# Altium PCB PendulOptic_pcb 1.PcbDoc (part 1 of 2)
Units mm, origin at the board's own origin, x right, y up, seen from the top; angles counter-clockwise.
Board outline 83.2 x 90 mm, 2 copper layers (Top Layer, Bottom Layer); 132 components, 90 nets, 419 pads, 153 vias.
Unrouted connection lines stored in the file: 4.
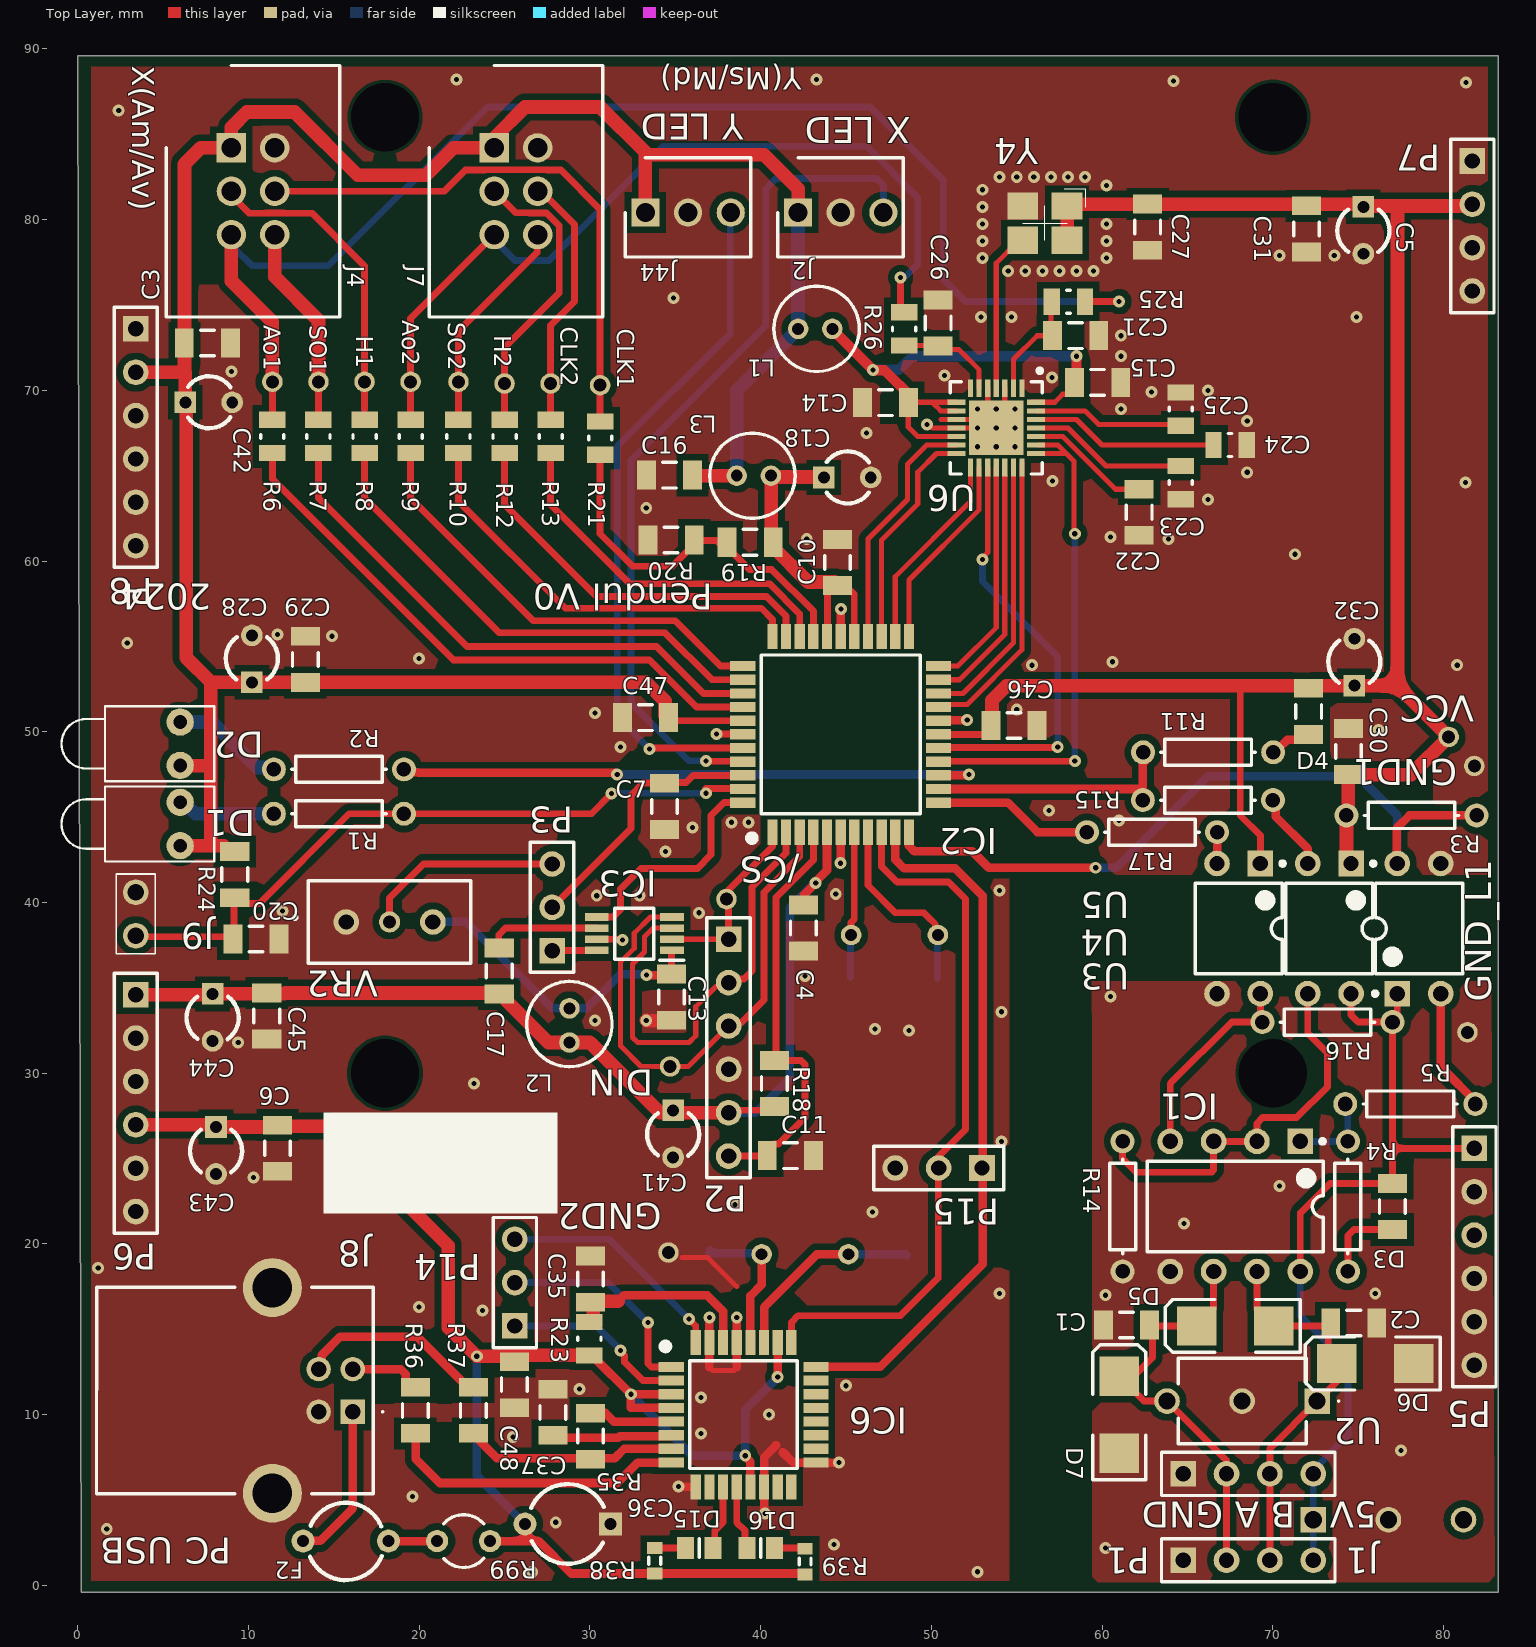
[diagram p0: Top Layer view]
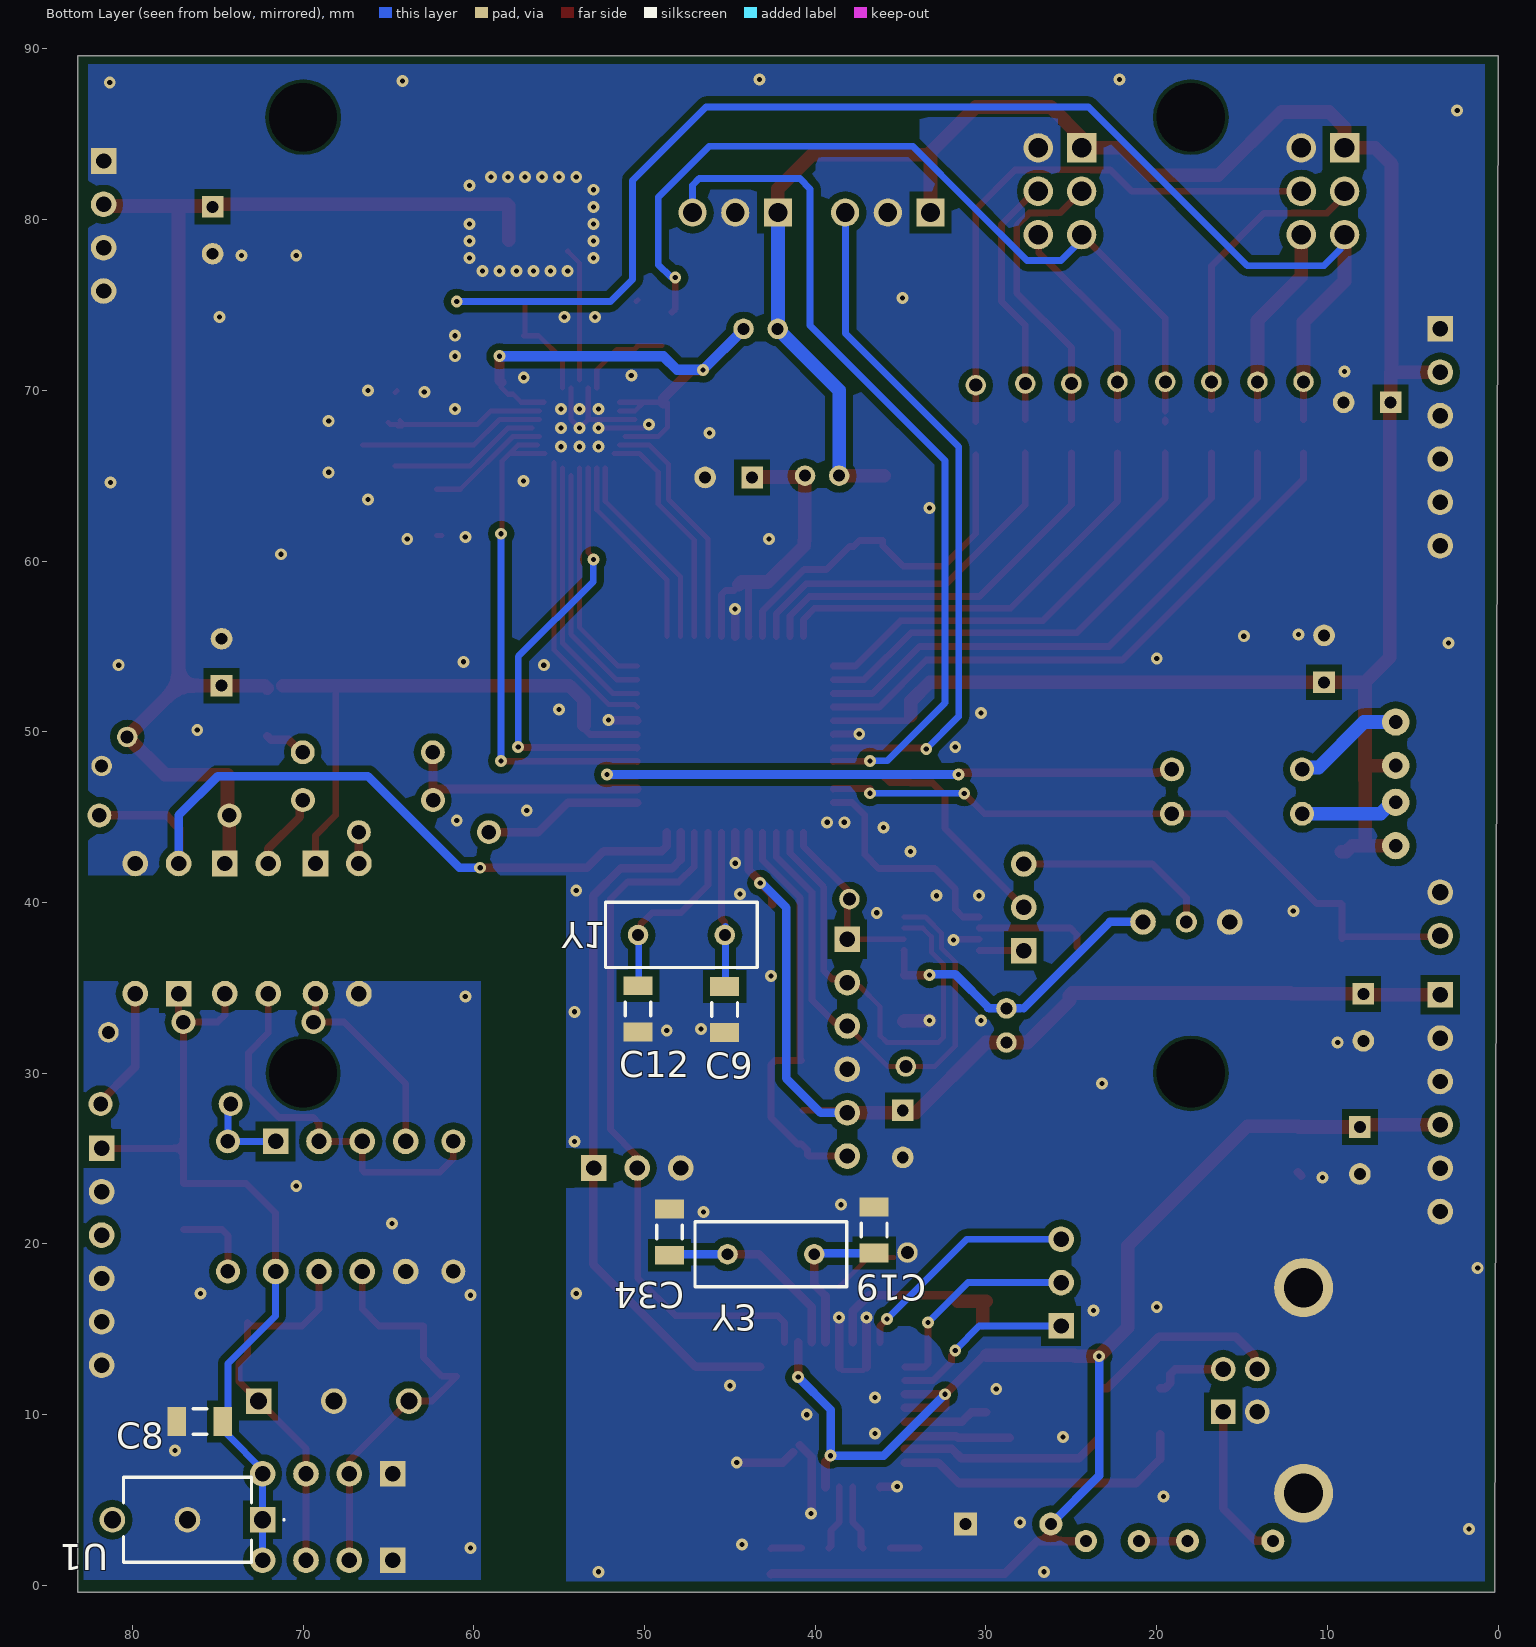
[diagram p1: Bottom Layer view, seen from below]

## Layer stack, top to bottom
Top Solder: solder mask 0.0102, Solder Resist, Dk 3.5
Top Layer: signal copper 0.0356
Dielectric 1: dielectric 0.32, FR-4, Dk 4.8
Bottom Layer: signal copper 0.0356
Bottom Solder: solder mask 0.0102, Solder Resist, Dk 3.5

## Board outline
83.2,-0.4 0.2,-0.4 0,89.6 83.2,89.6

## Design rules (kind name [scope] priority, off if disabled: settings)
Clearance [All] p1: gap=0.2 ignorepadtopadclearanceinfootprint=FALSE except(0.1: SMDPad-SMDPad; 0.4: Arc-Poly Track-Poly SMDPad-Poly THPad-Poly Via-Poly Fill-Poly Poly-Poly)
HoleSize [All] p1: absolutevalues=TRUE maxlimit=5 minlimit=0.025 maxpercent=80.000 minpercent=20.000
MinimumSolderMaskSliver [All] p1: minsoldermaskwidth=0
PlaneClearance [All] p1: clearance=0.3
PolygonConnect [All] p1: connectstyle=Direct reliefconductorwidth=0.254 reliefentries=4 polygonreliefangle="90 Angle" airgapwidth=0.254
RoomDefinition PlacaBaza [InComponentClass('PlacaBaza')] p1: confinementstyle=ConfineIn formatcopy=TRUE lockcomponents=FALSE outline 83.2,89.6 0.2,89.6 0.2,0 83.2,0
RoutingVias [All] p1: holewidth=0.3 width=0.7 viastyle="Through Hole" minholewidth=0.3 minwidth=0.7 maxholewidth=0.3 maxwidth=0.7
ShortCircuit [InNet('No Net')] p1: allowed=TRUE
SilkToSilkClearance [All] p1: silktosilkclearance=0
SilkToSolderMaskClearance [IsPad] p1: minsilkscreentomaskgap=0 clearancetoexposedcopper=TRUE
SolderMaskExpansion [All] p1: expansion=0.102 istentingtop=FALSE
Width [All] p1: maxlimit=0.8 minlimit=0.3 preferedwidth=0.4
24 further rules are at their usual default settings.

## Classes and differential pairs
component class Designator2: C19 C34 C35 C36 C37 C38 C48 D15 D16 F2 IC6 J8 P14 P15 R23 R35 R36 R37 R38 R39 R99 Y3
component class PlacaBaza: /CS Ao1 Ao2 C1 C2 C3 C4 C5 C6 C7 C8 C9 C10 C11 C12 C13 C14 C15 C16 C17 C18 C20 C21 C22 C23 C24 C25 C26 C27 C28 C29 C30 C31 C32 C41 C42 C43 C44 C45 C46 C47 CLK1 CLK2 D1 D2 D3 D4 D5 D6 D7 DIN GND1 GND2 GND_L1 H1 H2 IC1 IC2 IC3 J1 J2 J4 J7 J9 J44 L1 L2 L3 P1 P2 P3 P5 P6 P7 P8 R1 R2 R3 R4 R5 R6 R7 R8 R9 R10 R11 R12 R13 R14 R15 R16 R17 R18 R19 R20 R21 R24 R25 R26 SO1 SO2 U1 U2 U3 U4 U5 U6 VCC VR2 Y1 Y4

## Components (designator, comment, footprint, x,y, rotation, side; value= is the part's Value field where it differs from the comment)
/CS "Testpoint" TP#1 38,40.2 r90 top
Ao1 "Testpoint" TP#1 11.4,70.5 r90 top
Ao2 "Testpoint" TP#1 19.5,70.5 r90 top
C1 "1206CAP 100pF" "1206 CAP" 61.375,15.225 r180 top value=100pF
C2 "1206CAP 100pF" "1206 CAP" 74.8,15.4 r0 top value=100pF
C3 "1206CAP 100nF" "1206 CAP" 7.65,72.8 r0 top value=100nF
C4 "1206CAP 100nF" "1206 CAP" 42.525,38.45 r270 top value=100nF
C5 "1206CAP 100nF" "1206 CAP" 72,79.4 r270 top value=100nF
C6 "1206CAP 100nF" "1206 CAP" 11.725,25.55 r270 top value=100nF
C7 "1206CAP 1nF" "1206 CAP" 34.4,45.575 r270 top value=1nF
C8 "1206CAP 100nF" "1206 CAP" 76.109,9.572 r0 bottom value=100pF
C9 "1206CAP 100pF" "1206 CAP" 45.275,33.675 r270 bottom value=100pF
C10 "1206CAP 100nF" "1206 CAP" 44.475,59.971 r90 top value=100nF
C11 "1206CAP 1uF" "1206 CAP" 41.8,25.2 r0 top value=1u
C12 "1206CAP 100pF" "1206 CAP" 50.347,33.716 r270 bottom value=100pF
C13 "1206CAP 100nF" "1206 CAP" 34.8,34.4 r270 top value=100nF
C14 "1206CAP 100nF" "1206 CAP" 47.25,69.25 r180 top value=100nF
C15 "1206CAP 100nF" "1206 CAP" 59.8,70.5 r0 top value=100nF
C16 "1206CAP 100nF" "1206 CAP" 34.6,65 r180 top value=100nF
C17 "1206CAP 100pF" "1206 CAP" 24.663,36.05 r90 top value=100pF
C18 "polarized cap 2.75 pitch" CAPPRD275W50D630H1100 43.7,64.9 r0 top value=100uF
C19 "1206CAP 33pF" "1206 CAP" 36.575,20.875 r90 bottom value=33pF
C20 "1206CAP 100nF" "1206 CAP" 10.5,37.9 r0 top value=100nF
C21 "1206CAP 22pF" "1206 CAP" 58.509,73.228 r0 top value=22pF
C22 "1206CAP 100nF" "1206 CAP" 62.2,62.8 r270 top value=100nF
C23 "1206CAP 0.33uF" 0805 64.6,64.6 r90 top value=0.33pF
C24 "1206CAP 0.33uF" 0805 67.5,66.8 r180 top value=0.33pF
C25 "1206CAP 0.33uF" 0805 64.6,68.9 r270 top value=0.33pF
C26 "1206CAP 100nF" "1206 CAP" 50.372,74.009 r90 top value=100nF
C27 "1206CAP 100nF" "1206 CAP" 62.7,79.5 r270 top value=100nF
C28 "polarized cap 2.75mm pitch" CAPPRD275W50D630H1100 10.2,52.9 r90 top value=100uF
C29 "1206CAP 100nF" "1206 CAP" 13.3,54.3 r90 top value=100nF
C30 "1206CAP 100nF" "1206 CAP" 74.4,48.9 r90 top value=100nF
C31 "polarized cap 2.75mm pitch" CAPPRD275W50D630H1100 75.3,80.75 r270 top value=100uF
C32 "polarized cap 2.75mm pitch" CAPPRD275W50D630H1100 74.775,52.7 r90 top value=100uF
C34 "1206CAP 33pF" "1206 CAP" 48.575,20.75 r90 bottom value=33pF
C35 "1206CAP 100nF" "1206 CAP" 30,18 r90 top value=100nF
C36 "polarized cap 5mm pitch" "TH polarized 5mm" 28.7,3.6 r0 top value=100nF
C37 "1206CAP 33nF" "1206 CAP" 27.8,10.2 r90 top value=33nF
C41 "polarized cap 2.75mm pitch" CAPPRD275W50D630H1100 34.875,27.825 r270 top value=100uF
C42 "polarized cap 2.75mm pitch" CAPPRD275W50D630H1100 6.3,69.3 r0 top value=100uF
C43 "polarized cap 2.75mm pitch" CAPPRD275W50D630H1100 8.1,26.85 r270 top value=100uF
C44 "polarized cap 2.75mm pitch" CAPPRD275W50D630H1100 7.9,34.65 r270 top value=100uF
C45 "1206CAP 100nF" "1206 CAP" 11.1,33.3 r270 top value=100nF
C46 "1206CAP 100nF" "1206 CAP" 54.9,50.4 r0 top value=100nF
C47 "1206CAP 100nF" "1206 CAP" 33.2,50.8 r180 top value=100nF
C48 "1206CAP 100nF" "1206 CAP" 25.6,11.7 r270 top value=100nF
CLK1 "Testpoint" TP#1 30.6,70.3 r90 top
CLK2 "Testpoint" TP#2 27.3,70.4 r90 top
D1 "LED1" LED-1 6,44.6 r180 top
D2 "LED1" LED-1 6,49.3 r180 top
D3 "LED1" C1206 77,22.2 r270 top
D4 "LED1" C1206 72.1,51.2 r270 top
D5 "D Schottky" SMB 67.8,15.2 r180 top
D6 "D Schottky" SMB 76,13 r180 top
D7 "D Schottky" SMB 61,10 r90 top
D15 "LED0" 6-0805_L 36.4,2.2 r0 top
D16 "LED0" 6-0805_L 40,2.2 r180 top
DIN "Testpoint" TP#1 34.7,30.4 r90 top
F2 "Fuse 2" "THROUGH HOLE 5mm" 15.7,2.6 r0 top
GND1 "Testpoint" TP#1 81.8,48 r90 top
GND2 "Testpoint" TP#3 31.6,19.5 r90 top
GND_L1 "Testpoint" TP#1 81.4,32.4 r90 top
H1 "Testpoint" TP#1 16.8,70.5 r0 top
H2 "Testpoint" TP#4 24.7,70.4 r0 top
IC1 "SN65HVD11SJD" DIP-8 67.8,22.2 r270 top
IC2 "ATMEGA1284-PU" QFP80P1200X1200X120-44N 44.688,49.85 r90 top
IC3 "MCP4822-E_MS" SOP65P490X110-8N 32.6,38.175 r180 top
IC6 "FT232BL_TR" QFP80P900X900X160-32N 39,10 r0 top
J1 "TB008A-508-04BE" HDR1X4 64.75,1.475 r0 top
J2 "22-04-1031" SHDR3W64P0X250_1X3_700X580X1170P 42.188,80.413 r180 top
J4 "5-102619-1" SHDR6W66P254_2X3_1473X1016X1118P 9,84.2 r270 top
J7 "5-102619-1" SHDR6W66P254_2X3_1473X1016X1118P 24.4,84.2 r270 top
J8 "USB1030-GF-P-B-B" USB1030GFPBB 16.11,10.17 r270 top
J9 "87224-2" 872242 3.4,40.6 r270 top
J44 "22-04-1031" SHDR3W64P0X250_1X3_700X580X1170P 33.25,80.413 r180 top
L1 "RLB0608-471KL" RLB0608471KL 42.2,73.6 r180 top value=10mH
L2 "RLB0608-471KL" RLB0608471KL 28.8,31.8 r270 top value=10mH
L3 "RLB0608-471KL" RLB0608471KL 40.6,65 r0 top value=10mH
P1 "Header 4" HDR1X4 64.75,6.538 r0 top
P2 "Header 6H" HDR1X6 38.125,37.85 r270 top
P3 "Header 3" HDR1X3 27.788,37.175 r90 top
P5 "Header 6" HDR1X6 81.8,25.6 r270 top
P6 "Header 6" HDR1X6 3.4,34.6 r270 top
P7 "Header 4" HDR1X4 81.684,83.436 r270 top
P8 "Header 6" HDR1X6 3.4,73.6 r270 top
P14 "Header 3" HDR1X3 25.6,15.2 r90 top
P15 "Header 3" HDR1X3 52.965,24.45 r180 top
R1 "TH RES 1K" AXIAL-0.3 15.3,45.2 r180 top value=1K
R2 "TH RES 1K" AXIAL-0.3 15.3,47.8 r180 top value=1K
R3 "TH RES 2K2" AXIAL-0.3 78.125,45.1 r180 top value=2k2
R4 "TH RES 2K2" AXIAL-0.3 74.4,22.2 r270 top value=2k2
R5 "TH RES 2K2" AXIAL-0.3 78.05,28.2 r0 top value=2k2
R6 "0805RES 100 OHM" 0805 11.4,67.3 r90 top value=100
R7 "0805RES 100 OHM" 0805 14.1,67.3 r90 top value=100
R8 "0805RES 100 OHM" 0805 16.8,67.3 r90 top value=100
R9 "0805RES 100 OHM" 0805 19.5,67.3 r90 top value=100
R10 "0805RES 100 OHM" 0805 22.3,67.3 r90 top value=100
R11 "TH RES 2K2" AXIAL-0.3 66.21,48.8 r0 top value=2k2
R12 "0805RES 100 OHM" 0805 25,67.3 r90 top value=100
R13 "0805RES 100 OHM" 0805 27.7,67.3 r90 top value=100
R14 "TH RES 2K2" AXIAL-0.3 61.2,22.2 r90 top value=2k2
R15 "TH RES 2K2" AXIAL-0.3 66.2,46 r180 top value=2k2
R16 "TH RES 2K2" AXIAL-0.3 73.2,33 r0 top value=2k2
R17 "TH RES 2K2" AXIAL-0.3 62.925,44.125 r180 top value=2k2
R18 "TH RES 2K2" C1206 40.8,29.4 r90 top value=10K
R19 "1206RES 1K" "1206 CAP" 39.325,61.075 r180 top value=1K
R20 "1206RES 1K" "1206 CAP" 34.7,61.2 r180 top value=1K
R21 "0805RES 100 OHM" 0805 30.6,67.2 r270 top value="100 Ohm"
R23 "0805RES 1K" 0805 29.975,14.45 r270 top value=1K
R24 "1206RES 4K7" "1206 CAP" 9.225,41.575 r270 top value=4k7
R25 "0805RES 50 OHM" 0805 58.025,75.2 r0 top value="50 Ohm"
R26 "0805RES 50 OHM" 0805 48.4,73.6 r90 top value="50 Ohm"
R35 "1206RES 1K5" "1206 CAP" 30,8.8 r90 top value=1.5K
R36 "1206RES 27 OHM" "1206 CAP" 19.8,10.2 r270 top value=27
R37 "1206RES 27 OHM" "1206 CAP" 23.2,10.2 r270 top value=27
R38 "0603RES 1K" J1-0603 33.8,1.45 r270 top value=1K
R39 "0603RES 1K" J1-0603 42.6,1.4 r270 top value=1K
R99 "PTC" R38 22.6,2.6 r90 top
SO1 "Testpoint" TP#1 14.1,70.5 r90 top
SO2 "Testpoint" TP#5 22.2,70.5 r90 top
U1 "2036-07-B2LF" 203607B2LF 72.37,3.848 r0 bottom
U2 "2036-07-B2LF" 203607B2LF 72.6,10.8 r180 top
U3 "Optoisolator1" DIP-4 78.563,38.475 r90 top
U4 "Optoisolator1" DIP-4 73.313,38.475 r270 top
U5 "Optoisolator1" DIP-4 68,38.475 r270 top
U6 "MAX1193" QFN50P500X500X80_HS-29N 53.8,67.8 r270 top
VCC "Testpoint" TP#1 80.3,49.7 r90 top
VR2 "3296W-1-104LF" 3296W-1 18.265,38.863 r0 top
Y1 "XTAL" RAD-0.2 47.84,38.1 r180 bottom
Y3 "6MHz" RAD-0.2 42.6,19.4 r0 bottom
Y4 "Crystal SG-8018CB 40M" SG-8018CB 56.65,79.8 r180 top

## Footprints (in the part's own frame and the unit in brackets; to place one, negate y for a bottom-side part, rotate by r counter-clockwise, add the part's x,y. Pads: shape width x height; smd on the part's side, far side on the other; paste and mask are expansions set on the pad)
6-0805_L [mm] "Chip Resistor, Body 2.0x1.2mm, IPC High Density"
  rect 1x1.3 smd: 1(-0.8,0) 2(0.8,0)
  silkscreen extent 0,-0.55 0,0.55, body extent -1.07,-0.7 1.07,0.7, height 0.7
0805 [mm]
  rect 0.95x1.55 smd: 1(-0.975,0) 2(0.975,0)
  silkscreen extent -0.1,-0.67 0.1,0.67, body extent -1,-0.77 1,0.77, height 1.45
"1206 CAP" [mm]
  rect 1.1x1.7 smd: 1(1.291,-0.028) 2(-1.409,-0.028)
  silkscreen extent -0.46,-0.78 0.34,0.72, body extent -1.76,-0.93 1.64,0.87, height 1.3
3296W-1 [mm]
  round 1.5 hole 0.9: 1(-2.54,0) 3(2.54,0)
  round 1.24 hole 0.74: 2(0,0)
  silkscreen extent -5.64,-2.41 4.76,2.41, body extent -4.78,-2.48 4.78,2.35, height 11.55
203607B2LF [mm]
  rect 1.5x1.5 hole 1: 1(0,0)
  round 1.5 hole 1: 2(4.4,0) 3(8.8,0)
  silkscreen extent -1.3,-2.5 8.15,2.5, body extent -0.4,-2.5 9.2,2.5, height 5.4
872242 [mil]
  round 59.09 hole 38: 1(0,0) 2(100,0)
  silkscreen extent -42,-45 142,45, body extent -42,-46 142,46, height 410
AXIAL-0.3 [mm] "Axial Device, Thru-Hole; 2 Leads; 0.3 in Pin Spacing"
  round 1.4 hole 0.85: 1(-3.81,0) 2(3.81,0)
  silkscreen extent -2.77,-0.76 2.77,0.76
C1206 [mm] "Chip Capacitor, Body 3.2x1.6mm, IPC High Density"
  rect 1.1x1.7 smd: 1(-1.35,0) 2(1.35,0)
  silkscreen extent -0.4,-0.75 0.4,0.75, body extent -1.7,-0.9 1.7,0.9, height 1.3
CAPPRD275W50D630H1100 [mm]
  rect 1.27x1.27 hole 0.7: 1(0,0)
  round 1.27 hole 0.7: 2(2.75,0)
  silkscreen extent 0.16,-1.52 2.65,1.53
DIP-4 [mm] "DIP; 4 Leads; Row Spacing 7.62 mm; Pitch 2.54 mm"
  rect 1.5x1.5 hole 0.9: 1(-3.81,1.27)
  round 1.5 hole 0.9: 2(-3.81,-1.27) 3(3.81,-1.27) 4(3.81,1.27)
  silkscreen extent -3.93,-2.55 2.65,2.69, body extent -3.15,-2.5 3.15,2.5, height 5.6
DIP-8 [mm] "DIP; 8 Leads; Row Spacing 7.62 mm; Pitch 2.54 mm"
  rect 1.5x1.5 hole 0.9: 1(-3.81,3.81)
  round 1.5 hole 0.9: 2(-3.81,1.27) 3(-3.81,-1.27) 4(-3.81,-3.81) 5(3.81,-3.81) 6(3.81,-1.27) 7(3.81,1.27) 8(3.81,3.81)
  silkscreen extent -3.93,-5.15 2.65,5.24, body extent -3.6,-5.15 3.6,5.15, height 5.08
HDR1X3 [mm] "Connector; Header; 3 Position"
  rect 1.5x1.5 hole 0.9: 1(0,0)
  round 1.5 hole 0.9: 2(2.54,0) 3(5.08,0)
  silkscreen extent -1.27,-1.27 6.35,1.27
HDR1X4 [mm] "Connector; Header; 4 Position"
  rect 1.5x1.5 hole 0.9: 1(0,0)
  round 1.5 hole 0.9: 2(2.54,0) 3(5.08,0) 4(7.62,0)
  silkscreen extent -1.27,-1.27 8.89,1.27
HDR1X6 [mm] "Connector; Header; 6 Position"
  rect 1.5x1.5 hole 0.9: 1(0,0)
  round 1.5 hole 0.9: 2(2.54,0) 3(5.08,0) 4(7.62,0) 5(10.16,0) 6(12.7,0)
  silkscreen extent -1.27,-1.27 13.97,1.27
J1-0603 [mm] "Chip Resistor, Body 1.6x0.8mm, IPC High Density"
  rect 0.7x0.9 smd: 1(-0.75,0) 2(0.75,0)
  silkscreen extent -0.2,-0.35 0.2,0.35, body extent -0.85,-0.48 0.85,0.48, height 0.9
LED-1 [mm] "LED; 2 Leads"
  round 1.6 hole 0.8: 1(0,1.27) 2(0,-1.27)
  silkscreen extent -2,-2.2 6.95,2.2
QFN50P500X500X80_HS-29N [mm] "QFN, 28-Leads, Body 5.00x5.00mm, Pitch 0.50mm, Thermal Pad 3.20x3.20mm, IPC Medium Density"
  rect 1.05x0.3 smd mask+0.08: 1(-2.325,1.5) 2(-2.325,1) 3(-2.325,0.5) 4(-2.325,0) 5(-2.325,-0.5) 6(-2.325,-1) 7(-2.325,-1.5) 15(2.325,-1.5) 16(2.325,-1) 17(2.325,-0.5) 18(2.325,0) 19(2.325,0.5) 20(2.325,1) 21(2.325,1.5)
  rect 0.3x1.05 smd mask+0.08: 8(-1.5,-2.325) 9(-1,-2.325) 10(-0.5,-2.325) 11(0,-2.325) 12(0.5,-2.325) 13(1,-2.325) 14(1.5,-2.325) 22(1.5,2.325) 23(1,2.325) 24(0.5,2.325) 25(0,2.325) 26(-0.5,2.325) 27(-1,2.325) 28(-1.5,2.325)
  rect 3.2x3.2 smd mask+0.05: 29(0,0)
  silkscreen extent -3.47,-2.7 2.7,2.7, body extent -2.6,-2.6 2.6,2.6, height 0.8
QFP80P900X900X160-32N [mm]
  rect 1.475x0.6 smd: 1(-4.238,2.8) 2(-4.238,2) 3(-4.238,1.2) 4(-4.238,0.4) 5(-4.238,-0.4) 6(-4.238,-1.2) 7(-4.238,-2) 8(-4.238,-2.8) 17(4.238,-2.8) 18(4.238,-2) 19(4.238,-1.2) 20(4.238,-0.4) 21(4.238,0.4) 22(4.238,1.2) 23(4.238,2) 24(4.238,2.8)
  rect 0.6x1.475 smd: 9(-2.8,-4.238) 10(-2,-4.238) 11(-1.2,-4.238) 12(-0.4,-4.238) 13(0.4,-4.238) 14(1.2,-4.238) 15(2,-4.238) 16(2.8,-4.238) 25(2.8,4.238) 26(2,4.238) 27(1.2,4.238) 28(0.4,4.238) 29(-0.4,4.238) 30(-1.2,4.238) 31(-2,4.238) 32(-2.8,4.238)
  silkscreen extent -4.77,-3.15 3.15,4.2, body extent -4.5,-4.5 4.5,4.5, height 1.6
QFP80P1200X1200X120-44N [mm]
  rect 1.475x0.6 smd: 1(-5.738,4) 2(-5.738,3.2) 3(-5.738,2.4) 4(-5.738,1.6) 5(-5.738,0.8) 6(-5.738,0) 7(-5.738,-0.8) 8(-5.738,-1.6) 9(-5.738,-2.4) 10(-5.738,-3.2) 11(-5.738,-4) 23(5.738,-4) 24(5.738,-3.2) 25(5.738,-2.4) 26(5.738,-1.6) 27(5.738,-0.8) 28(5.738,0) 29(5.738,0.8) 30(5.738,1.6) 31(5.738,2.4) 32(5.738,3.2) 33(5.738,4)
  rect 0.6x1.475 smd: 12(-4,-5.738) 13(-3.2,-5.738) 14(-2.4,-5.738) 15(-1.6,-5.738) 16(-0.8,-5.738) 17(0,-5.738) 18(0.8,-5.738) 19(1.6,-5.738) 20(2.4,-5.738) 21(3.2,-5.738) 22(4,-5.738) 34(4,5.738) 35(3.2,5.738) 36(2.4,5.738) 37(1.6,5.738) 38(0.8,5.738) 39(0,5.738) 40(-0.8,5.738) 41(-1.6,5.738) 42(-2.4,5.738) 43(-3.2,5.738) 44(-4,5.738)
  silkscreen extent -6.27,-4.65 4.65,5.4, body extent -6,-6 6,6, height 1.2
R38 [mm] "Crystal, Thru-Hole; 2 Leads; Body 3.1 x 8.2 mm (Dia.xH)"
  round 1.3 hole 0.7: 1(0,1.55) 2(0,-1.55)
  silkscreen extent -1.55,-1.19 1.55,1.17
RAD-0.2 [mm] "Radial Cap, Thru-Hole; 2 Leads; 0.2 in Pin Spacing"
  round 1.2 hole 0.7: 1(-2.54,0) 2(2.54,0)
  silkscreen extent -4.44,-1.91 4.44,1.91
RLB0608471KL [mm]
  round 1.2 hole 0.7: 1(0,0) 2(-2,0)
  silkscreen extent -3.58,-2.5 1.42,2.5, body extent -3.5,-2.5 1.5,2.5, height 7.6
SG-8018CB [mm]
  rect 1.8x1.6 smd mask+0.1: 1(-1.3,-1) 2(1.3,-1) 3(1.3,1) 4(-1.3,1)
  rect 1.8x1.6 on Top Paste mask+0.3: 1(-1.3,-1) 2(1.3,-1) 3(1.3,1) 4(-1.3,1)
  silkscreen extent -2.4,-2 1.3,1, body extent -2.53,-1.7 2.47,1.7, height 1.2
SHDR3W64P0X250_1X3_700X580X1170P [mm]
  rect 1.65x1.65 hole 1.1: 1(0,0)
  round 1.65 hole 1.1: 2(-2.5,0) 3(-5,0)
  silkscreen extent -6.18,-3.2 1.17,2.6, body extent -6,-3.2 1,2.6, height 11.7
SHDR6W66P254_2X3_1473X1016X1118P [mm]
  rect 1.725x1.725 hole 1.15: 1(0,0)
  round 1.725 hole 1.15: 2(0,2.54) 3(2.54,0) 4(2.54,2.54) 5(5.08,0) 6(5.08,2.54)
  silkscreen extent -4.83,-3.81 9.91,6.35, body extent -4.83,-3.32 9.91,6.84, height 11.18
SMB [mm] "DO-214-AA/SMB; 2 C-Bend Leads; Body 5.3 x 3.6 mm, inc. leads (LxW)"
  rect 2.3x2.3 smd: 1(-2.25,0) 2(2.25,0)
  silkscreen extent -3.8,-1.55 4.1,1.55
SOP65P490X110-8N [mm]
  rect 1.4x0.45 smd: 1(-2.2,0.975) 2(-2.2,0.325) 3(-2.2,-0.325) 4(-2.2,-0.975) 5(2.2,-0.975) 6(2.2,-0.325) 7(2.2,0.325) 8(2.2,0.975)
  silkscreen extent -2.9,-1.5 1.15,1.55, body extent -2.45,-1.5 2.45,1.5, height 1.1
"TH polarized 5mm" [mm]
  rect 1.35x1.35 hole 0.7: 1(2.5,0)
  round 1.35 hole 0.7: 2(-2.5,0)
  silkscreen extent -2.15,-2.33 2.12,2.34
"THROUGH HOLE 5mm" [mm]
  round 1.35 hole 0.7: 1(-2.5,0) 2(2.5,0)
  silkscreen extent -2.1,-2.29 2.12,2.24
TP#1 [mm] "Test point"
  round 1.2 hole 0.762: 1(0,0)
TP#2 [mm] "Test point"
  round 1.2 hole 0.762: 1(0,-0.4)
TP#3 [mm] "Test point"
  round 1.2 hole 0.762: 1(0,-3)
TP#4 [mm] "Test point"
  round 1.2 hole 0.762: 1(0.3,0)
TP#5 [mm] "Test point"
  round 1.2 hole 0.762: 1(0,-0.1)
USB1030GFPBB [mm]
  rect 1.431x1.431 hole 0.92: 1(0,0)
  round 1.431 hole 0.92: 2(-2.5,0) 3(-2.5,-2) 4(0,-2)
  round 3.45 hole 2.3: MH1(4.77,-4.71) MH2(-7.27,-4.71)
  silkscreen extent -7.3,-15.01 4.8,1.8, body extent -8.32,-15.01 5.82,1.19, height 11.3

## Part data
/CS Ao1 Ao2 CLK1 CLK2 DIN GND1 GND2 GND_L1 H1 H2 SO1 SO2 VCC: library part "Test point"
C1 C2: library part 04023A101FAT2A, Manufacturer_Name=AVX, Mouser Part Number=581-04023A101F, Arrow Part Number=04023A101FAT2A, Arrow Price/Stock=https://www.arrow.com/en/products/04023a101fat2a/avx, Datasheet Link=http://www.mouser.com/catalog/supplier/library/pdf/AVXSurfaceMountCeramic.pdf, Height=0.56mm, Manufacturer_Part_Number=04023A101FAT2A, Mouser Price/Stock=https://www.mouser.co.uk/ProductDetail/AVX/04023A101FAT2A/?qs=TT2fvNIaLUf5Vh3Ocjdicw%3D%3D
C3 C4 C5 C6 C7 C8 C10 C11 C13 C14 C15 C16 C17 C20 C21 C22 C26 C27 C29 C30 C45 C46 C47: library part Cap, LatestRevisionDate=17-Jul-2002, LatestRevisionNote="Re-released for DXP Platform.", PackageDescription="Radial Cap, Thru-Hole; 2 Leads; 0.3 in Pin Spacing", PackageReference=RAD-0.3, Published=8-Jun-2000, Publisher="Altium Limited"
C9 C12 C19 C34 C35 C37 C48: library part "Cap Semi", LatestRevisionDate=29-May-2009, LatestRevisionNote="IPC-7351 Footprint Added.", PackageDescription="Chip Capacitor", PackageReference=C1206, Published=8-Jun-2000, Publisher="Altium Limited"
C18 C41 C42 C43 C44: library part MAL215299601E3, Manufacturer_Name=Vishay, Mouser Part Number=594-MAL215299601E3, Datasheet Link=https://www.vishay.com/docs/28459/152cme.pdf, Height=10.5mm, Manufacturer_Part_Number=MAL215299601E3, Mouser Price/Stock=https://www.mouser.co.uk/ProductDetail/Vishay-BC-Components/MAL215299601E3?qs=xZ%2FP%252Ba9zWqbQPLOp9z%2FTFg%3D%3D
C23 C24 C25: library part 08055A150JAT2A, Manufacturer_Name="Kyocera AVX", Mouser Part Number=581-08055A150J, Arrow Part Number=08055A150JAT2A, Arrow Price/Stock=https://www.arrow.com/en/products/08055a150jat2a/avx?region=nac, Datasheet Link=https://componentsearchengine.com/Datasheets/1/06031A100FAT2A.pdf, Height=0.94mm, Manufacturer_Part_Number=08055A150JAT2A, Mouser Price/Stock=https://www.mouser.co.uk/ProductDetail/AVX/08055A150JAT2A?qs=pZVDklL%2Fs8hiEua37sqbaA%3D%3D
C28 C31 C32: library part MAL203855101E3, Manufacturer_Name=Vishay, Mouser Part Number=594-MAL203855101E3, Datasheet Link=https://ms.componentsearchengine.com/Datasheets/2/MAL203855101E3.pdf, Height=11mm, Manufacturer_Part_Number=MAL203855101E3, Mouser Price/Stock=https://www.mouser.co.uk/ProductDetail/Vishay-BC-Components/MAL203855101E3?qs=G99oyVYclWVud%252B%2Fs3vRKoA%3D%3D
C36: library part Cap2, PackageDescription="Capacitor; 2 Leads", PackageReference=CAPR5-4X5, Published=23-Sep-2002, Publisher="Altium Limited"
D1 D2 D3 D4: "Typical RED GaAs LED", LatestRevisionDate=08-Jul-2005, LatestRevisionNote="Mech Layer 1 removed.", PackageDescription="LED; 2 Leads", PackageReference=LED-1, Published=8-Jun-2000, Publisher="Altium Limited"
D5 D6 D7: "Schottky Diode", Code_JEDEC=DO-214-AA, LatestRevisionDate=17-Jul-2002, LatestRevisionNote="Re-released for DXP Platform.", PackageDescription="DO-214-AA/SMB; 2 C-Bend Leads; Body 5.3 x 3.6 mm, inc. leads (LxW)", PackageReference=SMB, Published=8-Jun-2000, Publisher="Altium Limited"
D15 D16: "Typical INFRARED GaAs LED", LatestRevisionDate=08-Jul-2005, LatestRevisionNote="Mech Layer 1 removed.", PackageDescription="LED; 2 Leads", PackageReference=LED-0, Published=8-Jun-2000, Publisher="Altium Limited"
F2: "Fuse", LatestRevisionDate=17-Jul-2002, LatestRevisionNote="Re-released for DXP Platform.", PackageDescription="Thru-Hole; 2 Leads", PackageReference=PIN-W2/E2.8, Published=8-Jun-2000, Publisher="Altium Limited"
IC1: "Integrated Circuit", Manufacturer_Name="Texas Instruments", Mouser Part Number=595-SN65HVD11SJD, Arrow Part Number=SN65HVD11SJD, Arrow Price/Stock=https://www.arrow.com/en/products/sn65hvd11sjd/texas-instruments, Datasheet Link=https://www.arrow.com/en/products/sn65hvd11sjd/texas-instruments, Height=4.45mm, Manufacturer_Part_Number=SN65HVD11SJD
IC2: "Integrated Circuit", Manufacturer_Name=Microchip, Mouser Part Number=556-ATMEGA1284-PU, Arrow Part Number=ATMEGA1284-PU, Arrow Price/Stock=https://www.arrow.com/en/products/atmega1284-pu/microchip-technology?region=nac, Datasheet Link=https://datasheet.datasheetarchive.com/originals/distributors/Datasheets_SAMA/b69cbc8d70054e051fa5fe38e41d8927.pdf, Height=4.826mm, Manufacturer_Part_Number=ATMEGA1284-PU, Mouser Price/Stock=https://www.mouser.co.uk/ProductDetail/Microchip-Technology-Atmel/ATMEGA1284-PU?qs=lwdSMh1%2FoYI%2FXs3D3l%2Fp1w%3D%3D
IC3: "Integrated Circuit", Arrow Part Number=MCP4822-E/MS, Manufacturer_Name=Microchip, Mouser Part Number=579-MCP4822-E/MS, Arrow Price/Stock=https://www.arrow.com/en/products/mcp4822-ems/microchip-technology?region=nac, Datasheet Link=https://datasheet.datasheetarchive.com/originals/distributors/Datasheets-DGA17/911642.pdf, Height=1.1mm, Manufacturer_Part_Number=MCP4822-E/MS, Mouser Price/Stock=https://www.mouser.co.uk/ProductDetail/Microchip-Technology-Atmel/MCP4822-E-MS?qs=usxtMOJb1Rzc5xsp0Zr6iQ%3D%3D
IC6: "Integrated Circuit", Manufacturer_Name="FTDI Chip", Manufacturer_Part_Number=FT232BL/TR, Datasheet Link=http://www.ftdichip.com/Support/Documents/DataSheets/ICs/DS_FT232BL_BQ.pdf, Height=1.6mm
J1: "Connector", Manufacturer_Name="CUI Devices", Mouser Part Number=490-TB008A-508-04BE, Datasheet Link=https://www.mouser.com/datasheet/2/670/tb008a_508-1550650.pdf, Height=16.22mm, Manufacturer_Part_Number=TB008A-508-04BE, Mouser Price/Stock=https://www.mouser.co.uk/ProductDetail/CUI-Devices/TB008A-508-04BE?qs=vLWxofP3U2wE%252BeCFz1tLxg%3D%3D
J2 J44: "Connector", Manufacturer_Name=Molex, Mouser Part Number=538-22-04-1031, Datasheet Link=https://componentsearchengine.com/Datasheets/2/22-04-1031.pdf, Height=11.7mm, Manufacturer_Part_Number=22-04-1031, Mouser Price/Stock=https://www.mouser.co.uk/ProductDetail/Molex/22-04-1031?qs=h9d0Ik7kMyy7or8gS%2F3ZEA%3D%3D
J4 J7: "Connector", Manufacturer_Name="TE Connectivity", Mouser Part Number=571-5-102619-1, Arrow Part Number=5-102619-1, Arrow Price/Stock=https://www.arrow.com/en/products/5-102619-1/te-connectivity, Datasheet Link=https://www.te.com/commerce/DocumentDelivery/DDEController?Action=showdoc&DocId=Customer+Drawing%7F102619%7FK3%7Fpdf%7FEnglish%7FENG_CD_102619_K3.pdf%7F5-102619-1, Height=11.176mm, Manufacturer_Part_Number=5-102619-1, Mouser Price/Stock=https://www.mouser.com/Search/Refine.aspx?Keyword=571-5-102619-1
J8: "Connector", Manufacturer_Name="GCT (GLOBAL CONNECTOR TECHNOLOGY)", Mouser Part Number=640-USB1030-GF-P-B-B, Datasheet Link=https://gct.co/files/drawings/usb1030.pdf?v=6f3e53a4-19ab-41a0-8ac3-960e4d6fce65, Height=11.2mm, Manufacturer_Part_Number=USB1030-GF-P-B-B, Mouser Price/Stock=https://www.mouser.co.uk/ProductDetail/GCT/USB1030-GF-P-B-B?qs=KUoIvG%2F9Ila4yhPpaOZhHA%3D%3D
J9: "Connector", Manufacturer_Name="TE Connectivity", Mouser Part Number=571-872242, Arrow Part Number=87224-2, Arrow Price/Stock=https://www.arrow.com/en/products/87224-2/te-connectivity?region=europe, Datasheet Link=https://datasheet.datasheetarchive.com/originals/distributors/Datasheets_SAMA/3b9b08c08f06dc562fe3ba32b60fa864.pdf, Height=10.3632mm, Manufacturer_Part_Number=87224-2, Mouser Price/Stock=https://www.mouser.co.uk/ProductDetail/TE-Connectivity/87224-2?qs=ZDXmSm13591yVHBRfmL3UQ%3D%3D
L1 L2 L3: "Inductor", Manufacturer_Name=Bourns, Mouser Part Number=652-RLB0608-471KL, Arrow Part Number=RLB0608-471KL, Arrow Price/Stock=https://www.arrow.com/en/products/rlb0608-471kl/bourns, Datasheet Link=https://componentsearchengine.com/Datasheets/2/RLB0608-471KL.pdf, Height=7.5mm, Manufacturer_Part_Number=RLB0608-471KL, Mouser Price/Stock=https://www.mouser.co.uk/ProductDetail/Bourns/RLB0608-471KL?qs=qtLBrsE9qZLH%252BdKTQ9WHfg%3D%3D
P1 P7: "Header, 4-Pin", LatestRevisionDate=17-Jul-2002, LatestRevisionNote="Re-released for DXP Platform.", Publisher="Altium Limited"
P2: "Header, 6-Pin, Right Angle", LatestRevisionDate=17-Jul-2002, LatestRevisionNote="Re-released for DXP Platform.", Publisher="Altium Limited"
P3 P14 P15: "Header, 3-Pin", LatestRevisionDate=17-Jul-2002, LatestRevisionNote="Re-released for DXP Platform.", Publisher="Altium Limited"
P5 P6 P8: "Header, 6-Pin", LatestRevisionDate=17-Jul-2002, LatestRevisionNote="Re-released for DXP Platform.", Publisher="Altium Limited"
R1 R2 R3 R4 R5 R11 R14 R15 R16 R17 R18 R19 R20 R24: library part Res1, LatestRevisionDate=17-Jul-2002, LatestRevisionNote="Re-released for DXP Platform.", PackageDescription="Axial Device, Thru-Hole; 2 Leads; 0.3 in Pin Spacing", PackageReference=AXIAL-0.3, Published=8-Jun-2000, Publisher="Altium Limited"
R6 R7 R8 R9 R10 R12 R13 R23 R35 R36 R37 R38 R39: library part Res3, LatestRevisionDate=29-May-2009, LatestRevisionNote="IPC-7351 Footprint Added.", PackageDescription="Chip Resistor", PackageReference=J1-0603, Published=8-Jun-2000, Publisher="Altium Limited"
R21 R25 R26: library part "RES 0402"
R99: library part "Res Varistor", "Varistor (Voltage-Sensitive Resistor)", Code_IPC=RESC2012, LatestRevisionDate=29-May-2009, LatestRevisionNote="IPC-7351 Footprint Added.", PackageDescription="Chip Resistor 0805 Case Size", PackageReference=6-0805, PackageVersion=Mar-2003, Published=24-Mar-1999, Publisher="Altium Limited"
U1 U2: "Undefined or Miscellaneous", Manufacturer_Name=Bourns, Mouser Part Number=652-2036-07-B2LF, Arrow Part Number=2036-07-B2LF, Arrow Price/Stock=https://www.arrow.com/en/products/2036-07-b2lf/bourns?region=nac, Datasheet Link=https://www.bourns.com/docs/Product-Datasheets/2036.pdf, Height=5.3mm, Manufacturer_Part_Number=2036-07-B2LF, Mouser Price/Stock=https://www.mouser.co.uk/ProductDetail/Bourns/2036-07-B2LF?qs=kJlCKCzaZTNDPuw9%252B%252B%252BnbA%3D%3D
U3 U4 U5: "4-Pin Phototransistor Optocoupler", DatasheetVersion=Nov-2003, LatestRevisionDate=04-Mar-2005, LatestRevisionNote="Sch pins 3 & 4 Swapped.", PackageReference=DIP-4, Published=24-Mar-1999, Publisher="Altium Limited"
VR2: "Variable Resistor", Manufacturer_Name=Bourns, Mouser Part Number=652-3296W-1-104LF, Arrow Part Number=3296W-1-104LF, Arrow Price/Stock=https://www.arrow.com/en/products/3296w-1-104lf/bourns?region=europe, Datasheet Link=https://datasheet.datasheetarchive.com/originals/distributors/Datasheets-10/DSA-187647.pdf, Manufacturer_Part_Number=3296W-1-104LF, Mouser Price/Stock=https://www.mouser.co.uk/ProductDetail/Bourns/3296W-1-104LF?qs=NxuKWO2Bm4Yv9t2iisRb6w%3D%3D
Y1: "Crystal Oscillator", LatestRevisionDate=17-Jul-2002, LatestRevisionNote="Re-released for DXP Platform.", PackageDescription="Crystal, Thru-Hole; 2 Leads; Body 3.1 x 8.2 mm (Dia.xH)", PackageReference=R38, Published=8-Jun-2000, Publisher="Altium Limited"
Y3: library part XTAL, "Crystal Oscillator", LatestRevisionDate=17-Jul-2002, LatestRevisionNote="Re-released for DXP Platform.", PackageDescription="Crystal, Thru-Hole; 2 Leads; Body 3.1 x 8.2 mm (Dia.xH)", PackageReference=R38, Published=8-Jun-2000, Publisher="Altium Limited"

## Free pads (board coordinates)
  round 1.524 hole 4: 0(70,86) 1(18,86) 2(18,30) 3(70,30)

## Via types
v1: diameter 0.7, hole 0.3, Top Layer to Bottom Layer, 153 vias

## Nets (pads, with @x,y where several pads share a name; then routed paths per layer and width w, separated by ;. In a path a pad name is that pad's centre, name@x,y a point inside that pad or via, vN(x,y) a via of type N, cw(c..) or ccw(c..) an arc to the next point about the centre after c; other vN are vias at no path point)
/CS: /CS.1 IC2.1 IC3.2 P2.1 | length 10.6
  Top Layer w0.3: IC3.2 P2.1
  Top Layer w0.4: P2.1 38.125,40.725 40.688,43.288 IC2.1
/LDATE: IC2.44 IC3.5 | length 13.4
  Top Layer w0.4: IC3.5 30.412,39.162 31.362,39.162 31.8,39.6 31.8,40.8 33,42 36.3,42 37.1,42.8 37.1,45.1 37.85,45.85 IC2.44
/SHDN: C17.1 IC3.6 | length 6.6
  Top Layer w0.4: C17.1@24.663,37.4 24.663,38.113 25.05,38.5 IC3.6
A: C1.2 D5.2 D7.2 IC1.6 J1.2 P1.2 U2.3 | length 24.6
  Top Layer w0.4: IC1.6 66.53,16.18 D5.2 62.95,15.2 62.95,13.35 61.85,12.25 D7.2 62.45,10.8 U2.3 67.29,7.31 P1.2 J1.2
A0: IC2.30 R19.1 R20.2 R21.2 | length 21.9
  Top Layer w0.4: R21.2 30.6,61.6 32.5,59.7 34.85,59.7 36.05,60.9 36.05,61.2 37.4,61.2 37.75,60.85 38,60.85 38.3,60.55 39.35,59.5 40.65,59.5 43.088,57.062 IC2.30
A/B: IC2.16 U6.17 | length 25.3
  Top Layer w0.3: v1(53,60.1) 53,60.208 53.3,60.508 U6.17@53.3,65.45
  Top Layer w0.4: IC2.16 50.45,49.075 57.375,49.075 v1(57.4,49.1)
  Bottom Layer w0.4: v1(53,60.1) 53,58.8 57.4,54.4 v1(57.4,49.1)
AO1: Ao1.1 J4.5 R6.2 R25.2 | length 78.9
  Top Layer w0.4: R6.2 Ao1.1 ; R25.2 v1(61,75.2)
  Top Layer w0.8: J4.5 9,76.4 11.4,74 Ao1.1
  Bottom Layer w0.4: J4.5 9.254,78.866 9.254,78.246 10.2,77.3 14.7,77.3 24,86.6 46.4,86.6 50.7,82.3 50.7,76.5 52,75.2 v1(61,75.2)
AO2: Ao2.1 J7.5 R9.2 R26.2 | length 49.1
  Top Layer w0.4: R9.2@19.5,68.155 R9.2 ; 19.5,68.775 Ao2.1@19.5,70.184 ; Ao2.1 19.5,74.22 J7.5@24.375,79.095 ; v1(48.2,76.6) 48.2,74.775 R26.2
  Bottom Layer w0.4: J7.5 24.4,78.8 25.6,77.6 27.6,77.6 30.9,80.9 34.3,84.3 46.2,84.3 49.2,81.3 49.2,77.365 48.493,76.657 48.257,76.657 v1(48.2,76.6)
B: C2.2 D5.1 D6.2 IC1.7 J1.3 P1.3 U2.1 | length 22.6
  Top Layer w0.4: IC1.7 69.07,16.18 D5.1 73.05,15.2 73.25,15.4 73.25,13.5 D6.2 73.75,11.95 U2.1 69.83,8.03 P1.3 J1.3
B0: C20.2 IC2.43 J9.2 R1.1 R24.1 | length 40.5
  Top Layer w0.4: J9.2@3.213,38 C20.2@9.15,38 ; C20.2@9.15,37.9 C20.2@9.15,38 ; v1(31.275,46.388) 30.087,45.2 R1.1 15.9,45.2 10.65,39.95 9.2,39.95 9.15,39.9 C20.2@9.15,38 ; v1@36.788,46.675 38.925,46.675 IC2.43
  Bottom Layer w0.4: v1(31.275,46.388) 31.287,46.4 v1(36.8,46.4)
CLK: U6.4 Y4.3@55.35,78.8 | length 7.8
  Top Layer w0.3: U6.4@53.8,70.6 53.8,77.45 Y4.3@54.5,78.15
CLK_Tsl1: CLK1.1 J4.4 R21.1 | length 32.8
  Top Layer w0.4: J4.4 21.46,81.66 22.7,82.9 23.855,82.9 23.877,82.922 27.463,82.922 27.485,82.9 28.3,82.9 30.6,80.6 CLK1.1 ; R21.1 30.6,69.884 CLK1.1@30.8,70.084
CLK_Tsl2: CLK2.1 J7.4 R13.2 | length 15
  Top Layer w0.4: J7.4 27.153,81.66 29.1,79.713 29.1,75.2 27.7,73.8 R13.2
D: IC1.4 R16.1 U5.4 | length 12
  Top Layer w0.4: IC1.4 63.99,29.39 67.6,33 R16.1 69.27,33.12 U5.4
D0: IC2.19 U6.21 | length 17.2
  Top Layer w0.3: IC2.19 50.576,51.6 52.1,51.6 55.3,54.8 U6.21@55.3,65.775
D1: IC2.20 U6.20 | length 15.8
  Top Layer w0.3: IC2.20 51.85,52.25 54.8,55.2 U6.20@54.8,65.447
D2: IC2.21 U6.19 | length 14.3
  Top Layer w0.3: IC2.21 51.65,53.05 54.3,55.7 U6.19@54.3,65
D3: IC2.22 U6.18 | length 13.7
  Top Layer w0.3: IC2.22 51.55,53.85 53.8,56.1 U6.18@53.8,65.45
D4: IC2.23 U6.16 | length 11.6
  Top Layer w0.3: IC2.23 48.688,58.888 52.8,63 U6.16@52.8,65.45
D5: IC2.24 U6.15 | length 11.7
  Top Layer w0.3: IC2.24 47.888,59.088 52.3,63.5 U6.15@52.3,65.451
D6: IC2.25 U6.14 | length 13.5
  Top Layer w0.3: IC2.25 47.088,61.234 49.2,63.347 49.2,65.2 50.3,66.3 U6.14@51.775,66.3
D7: IC2.26 U6.13 | length 14.4
  Top Layer w0.3: IC2.26 46.288,61.288 48.6,63.6 48.6,65.675 49.725,66.8 U6.13@51.45,66.8
D/R: IC2.13 R11.1 R15.2 | length 14.9
  Top Layer w0.5: IC2.13 62.35,46.65 R15.2@62.39,46.61 ; R15.2 R15.2@62.39,46.61 ; R11.1@62.79,48.8 62.79,48.556 62.39,48.156 R15.2@62.39,46.61
DIN: DIN.1 IC2.3 IC3.4 P2.3 | length 30.7
  Top Layer w0.3: IC3.4 33.551,39.15 32.6,38.199 32.6,37.325 31.8,36.525 31.8,31.6 33,30.4 35.755,30.4 P2.3
  Top Layer w0.4: P2.3 38.335,32.98 38.88,32.98 40.2,34.3 40.2,40.6 42.288,42.688 IC2.3
ECS: IC6.32 P14.3 | length 13.7
  Top Layer w0.4: v1(35.8,15.6) 36.2,15.2 IC6.32
  Bottom Layer w0.4: P14.3 31.12,20.28 v1(35.8,15.6)
EDATA: IC6.2 P14.1 | length 10.8
  Top Layer w0.4: v1(31.8,13.77) 31.8,13.689 32.022,13.467 32.022,13.078 33.1,12 IC6.2
  Bottom Layer w0.4: P14.1 30.4,15.2 31.8,13.8 v1(31.8,13.77)
ESK: IC6.1 P14.2 | length 12.6
  Top Layer w0.4: v1(33.4,15.4) 33.4,13 33.6,12.8 IC6.1
  Bottom Layer w0.4: P14.2 31.06,17.74 v1(33.4,15.4)
FLAG2: IC2.14 R2.1 | length 34.9
  Top Layer w0.5: R2.1@19.21,47.8 19.382,47.628 19.925,47.628 19.953,47.6 31.446,47.6 31.546,47.5 v1(31.6,47.5) ; IC2.14 52.096,47.45 52.146,47.5 v1(52.2,47.5)
  Bottom Layer w0.5: v1(31.6,47.5) v1(52.2,47.5)
GND: C3.1 C4.1 C5.1 C6.1 C7.1 C9.1 C10.1 C11.1 C12.1 C13.1 C14.1 C15.1 C16.1 C18.2 C19.1 C20.1 C21.1 C22.1 C23.1 C24.1 C25.1 C26.1 C27.1 C28.2 C29.1 C30.1 C31.2 C32.2 C34.1 C35.1 C36.1 C37.1 C41.2 C42.2 C43.2 C44.2 C45.1 C46.1 C47.1 C48.1 GND1.1 GND2.1 IC2.6 IC2.18 IC2.28 IC2.39 IC3.7 IC6.9 IC6.14 IC6.17 IC6.29 IC6.31 J2.2 J4.2 J7.2 J8.4 J8.MH1 J8.MH2 J9.1 J44.2 P2.4 P6.2 P6.3 P6.5 P6.6 P7.1 P7.3 P7.4 P8.1 P8.3 P8.4 P8.5 P8.6 P15.3 R20.1 U3.3 U6.1 U6.3 U6.5 U6.7 U6.10 U6.11 U6.29 VR2.1 Y4.2@55.35,80.8 | length 42.5
  Top Layer w0.3: v1@31.85,37.85 v1(31.9,37.8) ; 35.4,19.2 36.9,19.2 38.6,17.5 ; 37,12.776 37.176,12.6 38.424,12.6 38.6,12.776 ; v1(49.75,68) 49.858,68 50.058,67.8 U6.11 v1(52.7,67.8) ; C26.1 C26.1@50.5,75.2 ; 50.558,68.3 U6.10@51.45,68.3 ; U6.10 U6.29@53.3,68.3 ; U6.5 U6.29@53.3,68.3 ; U6.3 54.3,68.3 v1(53.8,67.8) U6.29@53.3,68.3 ; C22.1@61.872,61.509 C22.1 ; C25.1@64.5,69.975 C25.1
  Top Layer w0.4: IC3.7 v1@31.85,37.85 ; v1(37.425,49.875) 38.925,49.875 IC2.39
  Top Layer w0.5: P6.2 P6.2@3.591,31.869 ; C44.2 C44.2@7.95,31.95 ; C6.1@11.525,24 C6.1@11.725,24.2 ; v1(35.2,5.8) 35.219,5.781 36.181,5.781 IC6.9 ; 37,12.776 IC6.31 v1(37,15.7) ; 38.6,12.776 IC6.29 v1(38.6,15.7) ; v1(40.25,4.204) 40.2,4.254 IC6.14 40.2,7.5 40.9,8.2 ; 41.3,7.8 41.9,7.2 IC6.17 v1(44.6,7.2) ; v1(44.688,42.304) IC2.6 ; IC2.28@44.7,55.576 IC2.28 44.694,55.594 44.694,57.194 v1(44.7,57.2) ; IC2.18 50.45,50.675 52.075,50.675 v1(52.1,50.7)
  Top Layer w0.8: v1(33.3,33.1) 33.326,33.074 34.776,33.074 C13.1@34.8,33.05
  Bottom Layer w0.3: C36.1 C36.1@31.4,3.8
  Bottom Layer w0.5: P7.4@81.576,75.708 P7.4
  other v1: 26.6,0.8 52.7,0.8 44.3,2.4 1.7,3.3 28,3.7 19.6,5.2 25.5,8.7 36.5,8.9 40.5,10 36.5,11 29.4,11.5 45,11.7 23.7,16.1 20,16.3 54,17.1 1.2,18.6 46.55,21.875 38.5,22.3 10.3,23.9 54.1,26 23.2,29.4 9.4,31.8 48.7,32.5 46.7,32.6 30.3,33.1 54.1,33.6 42.6,35.7 36.4,39.4 12,39.5 30.4,40.4 32.9,40.4 44.4,40.5 54,40.7 34.425,43 36,44.4 38.3,44.7 39.3,44.7 61,44.8 56.9,45.4 31.8,49.1 76.2,50.1 30.3,51.1 55,51.3 55.9,53.9 80.8,53.9 60.6,54.1 20,54.3 2.9,55.2 14.9,55.6 11.7,55.7 71.3,60.4 42.7,61.3 63.9,61.3 60.5,61.4 33.3,63.1 66.2,63.6 81.284,64.6 57.1,64.7 68.5,65.2 52.7,66.7 53.8,66.7 54.9,66.7 46.2,67.5 54.9,67.8 68.5,68.2 52.7,68.9 53.8,68.9 54.9,68.9 61.1,68.9 62.9,69.9 66.2,70 57.075,70.75 50.775,70.875 9,71.1 61.1,72 61.1,73.2 52.9,74.3 54.7,74.3 74.9,74.3 34.9,75.4 54.5,77 55.5,77 56.5,77 57.5,77 58.5,77 59.5,77 53,77.75 60.25,77.75 70.4,77.9 73.6,77.9 53,78.75 60.25,78.75 53,79.75 60.25,79.75 53,80.75 53,81.75 60.25,82 54,82.5 55,82.5 56,82.5 57,82.5 58,82.5 59,82.5 2.4,86.4 81.325,88.025 64.175,88.125 22.175,88.2 43.275,88.2
GND_L: C1.1 C2.1 C8.1 D6.1 D7.1 GND_L1.1 IC1.5 J1.1 P1.1 P5.2 P5.4 P5.5 P5.6 R14.1 U1.2 U2.2 U5.3
  other v1: 60.2,2.2 77.5,7.9 60.2,17 76,17.1 64.8,21.2 70.4,23.4 60.5,34.5
LED_CMD1: IC2.41 J2.3 | length 50.3
  Top Layer w0.4: v1(36.8,48.3) 36.825,48.275 38.925,48.275 IC2.41 ; J2.3@47.127,80.286 J2.3@47.188,80.225
  Bottom Layer w0.4: v1(36.8,48.3) 35.8,48.3 32.4,51.7 32.4,65.9 40.3,73.8 40.3,81.8 40.9,82.4 46.8,82.4 47.188,82.012 J2.3
LED_CMD2: IC2.40 J44.3 | length 40.4
  Top Layer w0.4: v1(33.5,49) 33.55,49.05 IC2.40 ; J44.3@38.225,80.388 J44.3
  Bottom Layer w0.4: v1(33.5,49) 31.6,50.9 31.6,66.7 38.225,73.325 J44.3@38.225,80.388
NetC9_2: C9.2 IC2.7 Y1.2 | length 9.1
  Top Layer w0.4: Y1.2 45.3,38.84 45.488,39.028 IC2.7
  Bottom Layer w0.4: C9.2@45.26,35.626 Y1.2@45.26,38.6
NetC12_2: C12.2 IC2.8 Y1.1 | length 11.2
  Top Layer w0.4: IC2.8 46.288,41.013 47.9,39.4 49.574,39.4 49.809,39.166 49.809,39.148 50.227,38.73 50.227,38.253 Y1.1
  Bottom Layer w0.4: C12.2@50.34,35.54 Y1.1@50.34,38.1
NetC19_2: C19.2 IC6.28 Y3.1 | length 8.8
  Top Layer w0.5: IC6.28 39.4,16.961 40.06,17.621 Y3.1
  Bottom Layer w0.5: C19.2@37,19.45 C19.2@37.1,19.45 ; C19.2@37.03,19.62 C19.2@37.1,19.55 ; C19.2@37.04,19.39 C19.2@37.1,19.45 ; C19.2@37.2,19.55 C19.2@37.1,19.45 ; Y3.1 40.01,19.45 C19.2@37.1,19.45
NetC21_2: C21.2 R25.1 U6.2 | length 6.4
  Top Layer w0.3: U6.2@54.8,70.15 54.8,71.8 56.2,73.2 C21.2@57,73.2 ; R25.1@57,75.068 C21.2@57,73.2 ; C21.2 C21.2@57,73.2
NetC22_2: C22.2 U6.24 | length 7.3
  Top Layer w0.3: U6.24@56.15,67.3 57.7,67.3 60.791,64.209 C22.2
NetC23_2: C23.2 U6.25 | length 8.9
  Top Layer w0.3: U6.25@56.6,67.8 58,67.8 60.225,65.575 C23.2
NetC24_2: C24.2 U6.26 | length 11
  Top Layer w0.3: U6.26@56.15,68.3 58.5,68.3 60,66.8 C24.2
NetC25_2: C25.2 U6.27 | length 9.8
  Top Layer w0.3: U6.27@56.15,68.8 59,68.8 59.8,68 64.9,68 C25.2@65.012,68.113 ; C25.2@64.112,68.013 C25.2@64.325,68.225 ; C25.2@64.2,67.925 C25.2@64.475,67.925
NetC26_2: C26.2 R26.1 U6.6 | length 5.5
  Top Layer w0.3: R26.1@48.972,72.634 C26.2@50.4,72.634 ; C26.2 50.609,72.391 51.609,72.391 52.8,71.2 U6.6@52.8,70.15
NetC34_2: C34.2 IC6.27 Y3.2 | length 11.7
  Top Layer w0.5: IC6.27 40.2,16.3 43.3,19.4 Y3.2
  Bottom Layer w0.5: Y3.2 48.489,19.4 C34.2
NetC35_2: C35.2 IC6.30 R23.1 | length 11.5
  Top Layer w0.5: 31.65,16.65 32,17 36.858,17 37.8,16.058 IC6.30
  Top Layer w0.8: R23.1@30.2,15.4 30.2,16.45 30,16.65 31.65,16.65
NetC37_2: C37.2 IC6.6 | length 6.2
  Top Layer w0.5: C37.2@28.598,8.65 31.66,8.65 31.76,8.75 34.028,8.75 34.712,8.75 IC6.6
NetD1_2: D1.2 R1.2 | length 5.8
  Bottom Layer w0.8: D1.2 6.216,45.87 6.886,45.2 R1.2
NetD2_2: D2.2 R2.2 | length 6.7
  Top Layer w0.4: D2.2@5.85,50.97 D2.2@5.87,50.95
  Bottom Layer w0.8: D2.2 7.855,50.57 10.514,47.911 11.379,47.911 R2.2
NetD3_2: D3.2 R4.2 | length 4.9
  Top Layer w0.4: R4.2 74.4,20.503 74.75,20.853 D3.2@77,20.853
NetD4_2: D4.2 R11.2 | length 2.1
  Top Layer w0.5: R11.2@70.332,49.048 70.36,49.048 70.851,49.538 71.888,49.538 D4.2@72.1,49.75
NetD15_1: D15.1 R38.1 | length 1.7
  Top Layer w0.4: R38.1@33.914,2.2 D15.1
NetD16_1: D16.1 R39.1 | length 1.8
  Top Layer w0.4: D16.1 42.55,2.2 R39.1
NetF2_1: F2.1 J8.1 | length 9.4
  Top Layer w0.5: F2.1 13.208,2.608 14.208,2.608 16.11,4.51 J8.1
NetF2_2: F2.2 R99.1 | length 2.6
  Top Layer w0.5: F2.2 R99.1@20.767,2.6
NetIC1_2: IC1.2 IC1.3 R14.2 U4.3 | length 23
  Top Layer w0.4: R14.2 61.2,25 62,24.2 66.4,24.2 66.53,24.33 IC1.3 IC1.2 69.07,27.07 69.4,27.4 71.4,27.4 73.2,29.2 73.2,31.2 72.043,32.357 U4.3
NetIC2_31: IC2.31 R13.1 | length 21.6
  Top Layer w0.4: R13.1 27.7,63.3 32.325,58.675 40.525,58.675 42.288,56.912 IC2.31
NetIC2_32: IC2.32 R12.1 | length 23.4
  Top Layer w0.4: R12.1 25,63.3 30.375,57.925 40.35,57.925 41.488,56.787 IC2.32
NetIC2_33: IC2.33 R10.1 | length 25.1
  Top Layer w0.4: R10.1 22.3,63.5 28.563,57.238 40.038,57.238 40.688,56.587 IC2.33
NetIC2_34: IC2.34 R9.1 | length 26.2
  Top Layer w0.4: R9.1 19.5,63.7 26.7,56.5 35,56.5 37.65,53.85 IC2.34
NetIC2_35: IC2.35 R8.1 | length 29.2
  Top Layer w0.4: R8.1 16.8,63.7 24.7,55.8 34.4,55.8 37.15,53.05 IC2.35
NetIC2_36: IC2.36 R7.1 | length 32.2
  Top Layer w0.4: R7.1 14.1,63.7 22.8,55 33.9,55 36.65,52.25 IC2.36
NetIC2_37: IC2.37 R6.1 | length 34.6
  Top Layer w0.4: R6.1 11.4,64.8 22,54.2 33.5,54.2 36.25,51.45 IC2.37
NetIC6_5: IC6.5 R35.1 | length 5
  Top Layer w0.5: R35.1@30,10.15 30.85,10.15 31.4,9.6 IC6.5
NetIC6_7: IC6.7 R35.2 R37.1 | length 12.1
  Top Layer w0.5: R37.1@23.4,8.6 24.55,7.45 30,7.45 31.45,7.45 32,8 IC6.7
NetIC6_8: IC6.8 R36.1 | length 17.5
  Top Layer w0.5: R36.1@19.8,8.85 19.8,7.4 21.2,6 31.6,6 32.8,7.2 IC6.8
NetJ8_2: J8.2 R36.2 | length 4.5
  Top Layer w0.5: J8.2 18.907,12.67 19.2,12.377 19.2,11.85 19.5,11.55 R36.2@19.8,11.55
NetJ8_3: J8.3 R37.2 | length 11.6
  Top Layer w0.5: J8.3@14.199,12.67 J8.3 14.288,12.848 14.288,13.488 15.367,14.567 19.883,14.567 22.9,11.55 R37.2@23.2,11.55
NetR5_2: R5.2 U3.2 | length 7.4
  Top Layer w0.5: U3.2 79.833,30.377 R5.2@82.01,28.2
NetR15_1: R15.1 U4.2 | length 4.6
  Top Layer w0.5: R15.1 70.182,45.828 70.182,45.018 72.043,43.157 U4.2
NetR17_1: R17.1 U5.2 | length 1.8
  Top Layer w0.5: U5.2 66.733,42.287 66.733,44.123 R17.1
PD0/PD1: IC2.15 U6.22 U6.23 | length 30.1
  Top Layer w0.3: U6.22@55.825,66.3 57.9,66.3 ; U6.23@56.271,66.8 57.4,66.8 57.9,66.3 ; v1(58.4,61.6) 58.35,61.65 58.35,65.85 57.9,66.3
  Top Layer w0.4: IC2.15 50.45,48.275 58.375,48.275 v1(58.4,48.3)
  Bottom Layer w0.4: v1(58.4,48.3) v1(58.4,61.6)
R: IC1.1 R4.1 R5.1 | length 5
  Bottom Layer w0.4: IC1.1 R4.1 74.39,26.02 R5.1@74.39,28.2
RST: C11.2 IC2.4 P2.6 R18.2 | length 24.9
  Top Layer w0.4: P2.6 40.4,25.15 40.45,25.2 40.45,25.5 40.8,25.85 41.05,25.85 42.6,27.4 42.6,30.516 42.366,30.75 R18.2 40.9,30.85 40.9,40.3 43.088,42.488 IC2.4
RX0: IC2.9 IC6.25 P15.2 | length 41.4
  Top Layer w0.4: IC6.25 41.8,15.4 42.2,15.8 48.2,15.8 50.4,18 50.4,25.1 52,26.7 52,40.2 51,41.2 48,41.2 47.088,42.112 IC2.9
RXD: IC2.11 R3.1 U3.4 | length 43.3
  Top Layer w0.5: IC2.11 48.687,43.313 49,43 52.4,43 53.362,42.038 v1(59.625,42.038) ; U3.4 77.25,42.328 77.25,44.35 78,45.1 R3.1@82.248,45.1
  Bottom Layer w0.5: v1(59.625,42.038) 60.838,42.038 66.2,47.4 75,47.4 77.293,45.107 U3.4
RXLED: D15.2 IC6.11 | length 3.8
  Top Layer w0.4: D15.2 37.316,2.316 37.316,3.216 37.8,3.7 IC6.11
SCLK: IC2.2 IC3.3 P2.2 | length 26.8
  Top Layer w0.3: IC3.3 33.7,38.5 33.2,38 33.2,37.1 32.5,36.4 32.5,32.1 32.8,31.8 35.8,31.8 36.2,32.2 36.2,33.9 37.38,35.08 37.895,35.08 P2.2
  Top Layer w0.4: P2.2 38.335,35.52 39.02,35.52 39.5,36 39.5,40.9 41.488,42.888 IC2.2
SI/HOLD1: H1.1 J4.3 R8.2 | length 18.2
  Top Layer w0.4: J4.3 9,81.4 10.025,80.375 11.01,80.375 11.017,80.383 12.063,80.383 12.07,80.375 13.717,80.375 16.8,77.292 H1.1 16.8,68.875
SI/HOLD2: H2.1 J7.3 R12.2 | length 17.3
  Top Layer w0.4: J7.3 25.66,80.4 26.415,80.4 26.432,80.382 27.463,80.382 28.202,79.643 28.202,78.597 28.2,78.595 28.2,75.7 25,72.5 R12.2
SO1: J4.6 R7.2 SO1.1 | length 11.9
  Top Layer w0.4: R7.2 SO1.1
  Top Layer w0.8: J4.6 11.54,76.66 14.1,74.1 SO1.1
SO2: J7.6 R10.2 SO2.1 | length 12.8
  Top Layer w0.4: R10.2 22.3,73.467 26.915,78.083 26.915,79.095 J7.6
TX0: IC2.10 IC6.24 P15.1 | length 41.4
  Top Layer w0.5: IC6.24 47,12.8 53,18.8 53,23.6 53,40.4 51.4,42 48.4,42 47.888,42.512 IC2.10
TXD: IC2.12 R17.2 | length 9.4
  Top Layer w0.5: IC2.12 50.426,45.846 51.376,45.846 51.376,45.85 54.487,45.85 56.213,44.125 R17.2
TXLED: D16.2 IC6.12 | length 3.8
  Top Layer w0.4: IC6.12 38.6,3.7 39.084,3.216 39.084,2.316 D16.2
VCC: C3.2 C4.2 C5.2 C6.2 C16.2 C17.2 C27.2 C28.1 C29.2 C30.2 C31.1 C32.1 C36.2 C41.1 C42.1 C43.1 C44.1 C45.2 C46.2 C47.2 C48.2 D1.1 D2.1 D4.1 IC2.5 IC2.17 IC2.38 IC6.3 IC6.4 IC6.13 IC6.26 J2.1 J4.1 J7.1 J44.1 L1.1 L2.1 L3.2 P2.5 P6.1 P6.4 P7.2 P8.2 R3.2 R18.1 R23.2 R24.2 R38.2 R39.2 R99.2 U4.1 U5.1 VCC.1 Y4.1@57.95,80.8 Y4.4@57.95,78.8 | length 413
  Top Layer w0.4: C47.2@34.2,51.4 34.2,51.15 34.4,50.95 C47.2@34.55,50.8 ; C47.2@34.55,50.65 IC2.38 ; P2.5 38.272,27.837 R18.1@40.725,27.837 ; IC2.17 53.2,49.85 53.55,50.2 C46.2@53.55,50.4 ; 68.088,52.5 68.088,45.112 69.27,43.93 U5.1
  Top Layer w0.5: R99.2@24.147,2.6 R99.2 26.3,2.6 ; C36.2@26.3,3.4 26.3,2.6 ; R23.2@30.2,13.4 v1(32.4,11.2) ; IC6.4 32.4,10.4 v1(32.4,11.2) ; IC6.3 v1(32.4,11.2) ; v1(39.1,7.6) 39.1,7.546 39.4,7.246 IC6.13 ; v1(41,12.2) IC6.26 ; C4.2@42.525,39.9 42.525,40.45 v1(43.225,41.15) ; R39.2 42.55,0.7 R38.2 28.9,0.7 27,2.6 26.3,2.6 ; v1@43.1,41.1 43.888,41.888 IC2.5
  Top Layer w0.8: P6.4 7.97,26.98 C43.1 11.675,26.85 11.725,26.9 14.7,26.9 21.7,19.9 21.7,15.1 v1(23.375,13.425) 24.782,13.425 24.832,13.475 R23.2 ; P6.1 7.85,34.6 C44.1 12.1,34.65 12.15,34.7 24.963,34.7 25.113,34.55 25.113,34.25 27.563,31.8 L2.1 30,31.8 34.11,27.69 P2.5 ; P8.2 6.25,71.06 ; D1.1 7.79,43.33 ; D2.1 6.012,48.018 7.782,48.018 7.8,48 ; C42.1 6.3,71.06 6.25,71.06 ; C42.1@6.35,69.7 6.35,54.35 7.8,52.9 ; 7.79,47.21 7.79,43.33 ; 7.8,47.2 7.8,48 ; R24.2 8.897,42.984 8.551,43.33 7.79,43.33 ; J44.1 33.25,83.8 40.2,83.8 42.2,81.8 J2.1@42.2,80.425 ; 33.25,83.95 30.6,86.6 26.2,86.6 24.4,84.8 J7.1 22,84.2 20.4,82.6 16.4,82.6 12.7,86.3 9.9,86.3 9,85.4 J4.1 7.2,84.2 6.25,83.25 6.25,71.06 ; C47.2@34.4,50.95 34.4,51.8 33.3,52.9 C28.1 7.8,52.9 ; C16.2@35.95,65 L3.2@38.431,65 ; C46.2@53.55,50.4 53.55,51.85 54.4,52.7 71.181,52.7 ; Y4.4@57.95,78.8 57.95,80.8 58.05,80.9 C27.2@62.664,80.9 ; C27.2 75.141,80.909 C31.1 ; D4.1 72.25,52.7 C32.1 77.3,52.7 ; U4.1 74.315,42.553 R3.2 74.428,45.213 C30.2 78.091,47.491 VCC.1 77.3,52.7 ; C31.1@75.3,80.8 77.3,80.8 ; P7.2 81.588,80.8 77.3,80.8 ; 7.8,48 7.8,52.9 ; 77.3,52.7 77.3,80.8
  Bottom Layer w0.5: v1(23.375,13.425) 23.375,6.425 C36.2 ; v1@32.4,11.254 v1(32.4,11.2) 36,7.6 v1(39.1,7.6) 39.1,10.3 v1(41,12.2) ; P2.5 39.69,27.69 41.7,29.7 41.7,39.7 v1@43.1,41.1
  Bottom Layer w0.8: L3.2 38.6,70 L1.1 42.188,73.612 J2.1 ; P7.2@81.636,80.848 P7.2
VCCA: C10.2 C18.1 IC2.27 IC2.29 L3.1 R19.2 | length 19.4
  Top Layer w0.4: IC2.29 43.913,55.613 43.913,58.7 44.325,58.7 44.754,58.271 45.253,58.271 45.488,58.036 IC2.27
  Top Layer w0.8: L3.1 L3.1@40.625,64.975 ; C18.1 43.677,64.923 40.677,64.923 L3.1@40.625,64.975 ; C10.2@44.475,58.621 44.325,58.771 43.913,58.771 42.779,58.771 40.65,60.9 40.65,61.2 40.625,61.225 L3.1@40.625,64.975
VCCA1: C14.2 C15.2 L1.2 U6.8 U6.9 U6.12 U6.28 | length 35.3
  Top Layer w0.3: C14.2 48.646,69.266 48.646,67.854 49.2,67.3 U6.12@51.15,67.3 ; C14.2@48.909,69.228 48.981,69.3 50.122,69.3 U6.8@51.45,69.3 ; 50.122,69.228 50.55,68.8 U6.9@51.45,68.8 ; U6.28@55.902,69.3 57.224,69.3 57.696,69.772 57.991,69.772 58.391,70.172 C15.2
  Top Layer w0.6: L1.2 44.2,73.587 46.575,71.212 v1(46.575,71.2) 46.594,71.181 47.256,71.181 48.909,69.528 C14.2@48.909,69.228 ; C15.2 58.5,70.581 v1(58.5,72)
  Bottom Layer w0.6: L1.2 44.2,73.587 46.575,71.212 v1(46.575,71.2) 48.101,71.2 48.901,72 v1(58.5,72)
VCMP: C7.2 IC2.42 P3.2 | length 15.5
  Top Layer w0.4: P3.2 32.4,44.328 32.4,46.278 33.122,47 34.41,47 34.437,47.026 35.626,47.026 36.05,47.45 IC2.42
VCMP1: IC3.8 P3.1 | length 2.6
  Top Layer w0.4: P3.1 27.812,37.2 IC3.8
VCMP2: P3.3 VR2.2 | length 11.7
  Top Layer w0.4: VR2.2 18.265,40.265 20.255,42.255 P3.3
VDAC: C13.2 IC3.1 L2.2 VR2.3 | length 18.4
  Top Layer w0.4: C13.2@34.787,35.9 34.787,37.187 IC3.1
  Top Layer w0.5: v1(33.304,35.75) C13.2@34.8,35.75
  Bottom Layer w0.4: 27.8,33.8 28,33.8 ; 29.8,33.8 29.925,33.8
  Bottom Layer w0.5: VR2.3 22.738,38.863 27.8,33.8 ; 28,33.8 L2.2 29.8,33.8 31.8,35.8 32.946,35.8 32.958,35.788 33.266,35.788 v1(33.304,35.75)
VDD_LINE: C8.2 D3.1 IC1.8 J1.4 P1.4 P5.1 P5.3 R16.2 U1.1 U3.1 U4.4 | length 48.3
  Top Layer w0.4: IC1.8 71.61,21.81 73.35,23.55 D3.1 77.01,23.56 77.01,25.6 ; U4.4 74.583,33.417 75,33 R16.2 ; U3.1 77.293,33.283 R16.2 ; P5.1 77.01,25.6 ; 77.01,25.6 R16.2
  Bottom Layer w0.4: IC1.8 71.61,15.79 74.4,13 74.4,8.8 72.37,6.77 P1.4 U1.1 J1.4
pads on no net: IC6.10 IC6.15 IC6.16 IC6.18 IC6.19 IC6.20 IC6.21 IC6.22 IC6.23 U1.3 Y4.1@57.95,80.8 Y4.2@55.35,80.8 Y4.3@55.35,78.8 Y4.4@57.95,78.8

## Polygon pours and split planes (outlines as drawn)
GND on Top Layer "Bottom Layer-No Net" (solid, remove dead copper, pour order 14): 54.571,0.275 0.8,0.275 0.8,88.95 82.575,88.95 82.575,41.629 54.571,41.629
GND_L on Top Layer "Bottom Layer-No Net" (solid, pour order 23): 82.999,0.2 59.413,0.162 59.413,32.237 59.4,34.8 59.4,35.4 66,35.4 82.799,35.4
GND on Bottom Layer "Bottom Layer-No Net" (solid, remove dead copper, pour order 21): 54.6,0.25 0.8,0.25 0.8,89.1 82.575,89.1 82.575,41.6 54.6,41.6
GND_L on Bottom Layer "Bottom Layer-No Net" (solid, pour order 25): 59.6,35.4 82.85,35.4 82.85,0.325 59.6,0.325 59.6,34.2

## Other copper
Top Layer:
  pour cut-out: 47,69.775 46.975,69.75 46.975,68 47.975,68
  pour cut-out: 37.856,16.846 38.01,16.692 38.476,16.692 39.013,17.229 38.678,17.564 38.547,17.564
  pour cut-out: 42.372,14.419 46.428,13.181 44.335,15.64 44.747,15.155 43.666,15.271
  pour cut-out: 17.207,12.014 18.55,10.671 18.55,10.6 17.2,10.6
  pour cut-out: 31.699,48.25 32.35,48.901 32.75,48.901 32.75,48.127 33.069,47.808
  pour cut-out: 68.7,51.893 68.993,51.6 73.35,51.6 73.35,50.8
  pour cut-out: 76.594,43.21 79.4,46.015 79.4,47.8 76.793,47.8 75.678,46.685
  pour cut-out: 53.633,18.63 53.664,18.6 54.6,18.6 54.6,22.272
  pour cut-out: 28.231,43.327 28.1,43.458 28.1,44.6 30.6,44.6 31.25,45.25 33.45,43.05 31.11,40.71
  pour cut-out: 7.057,82.644 7.78,82.644 8.221,82.204 8.221,76.191 7.109,76.191 7.1,76.2
  pour cut-out: 41.209,16.382 41.363,16.228 41.829,16.228 42.366,16.765 42.031,17.1 41.9,17.1
  pour cut-out: 56.65,80.05 56.65,79.55 57.493,79.55 57.493,80.05
  pour cut-out: 20.827,9.6 20.877,9.55 20.877,8.9 22.227,8.9 22.427,9.1 22.173,9.355 22.173,9.6
  pour cut-out: 21.05,11.82 21.241,12.011 21.512,12.011 21.95,11.573 21.95,10.6 21.05,10.6
  pour cut-out: 25.408,63.469 25.539,63.6 27.2,63.6 27.2,63.223 31.59,58.833 31.09,58.333 30.544,58.333
  pour cut-out: 22.708,63.669 24.223,63.669 29.616,58.276 29.616,58.107 29.193,58.107 28.731,57.645
  pour cut-out: 19.908,63.869 20.277,63.5 21.892,63.5 21.892,63.331 27.753,57.47 27.292,57.008 26.769,57.008
  pour cut-out: 17.208,63.869 18.923,63.869 25.753,57.039 25.753,56.87 25.131,56.87 24.669,56.408